# Altium PCB ir_sender.PcbDoc
Units mil, origin at the board's own origin, x right, y up, seen from the top; angles counter-clockwise.
Board outline 6000 x 4000 mil, 2 copper layers (Top Layer, Bottom Layer); 3 components, 3 nets, 6 pads, 0 vias.
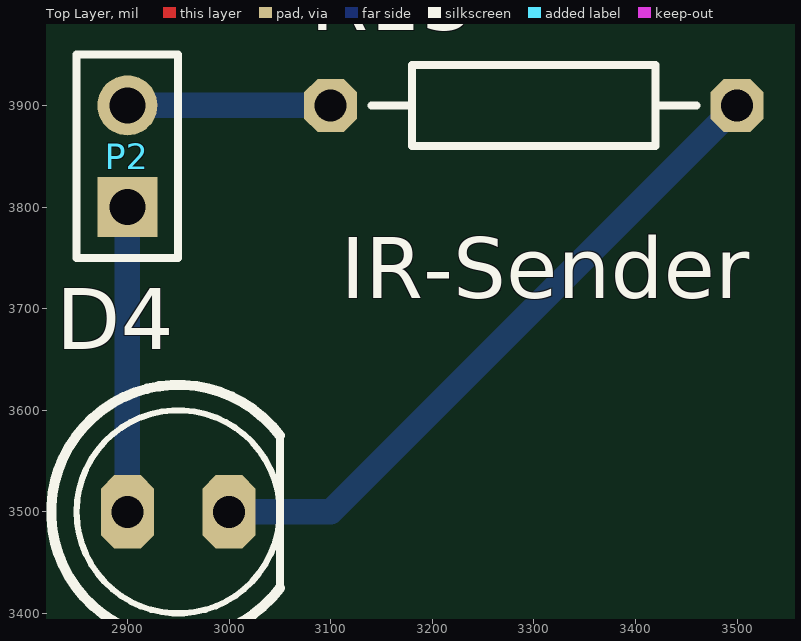
[diagram p0: Top Layer view]
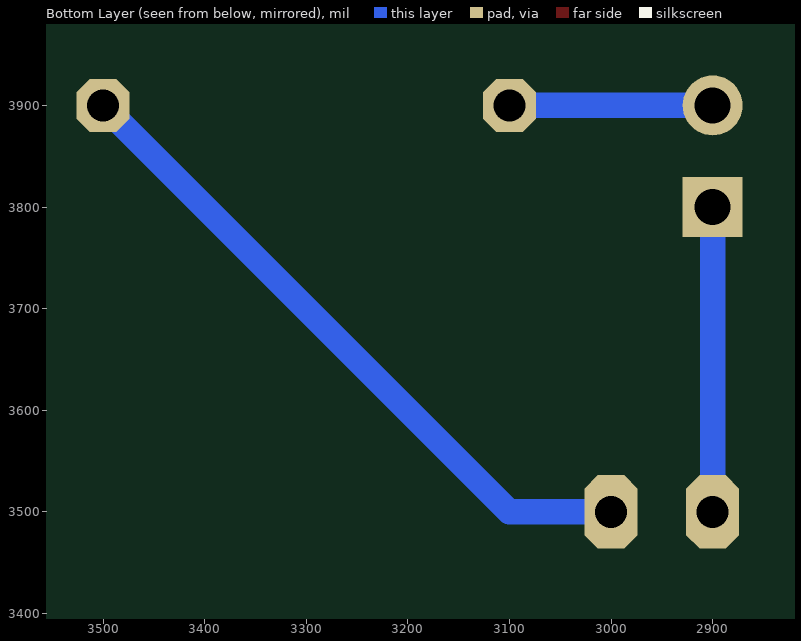
[diagram p1: Bottom Layer view, seen from below]

## Layer stack, top to bottom
Top Solder: solder mask 0.4, Solder Resist, Dk 3.5
Top Layer: signal copper 1.4
Dielectric1: dielectric 12.6, FR-4, Dk 4.8
Bottom Layer: signal copper 1.4
Bottom Solder: solder mask 0.4, Solder Resist, Dk 3.5

## Board outline
2580,2130 2580,6130 8580,6130 8580,2130

## Design rules (kind name [scope] priority, off if disabled: settings)
Clearance "Text (Polygon)" [inPolygon vs isText] p1: gap=0 ignorepadtopadclearanceinfootprint=FALSE
Clearance "Masseflaeche (Polygon)" [All vs inPolygon] p2: gap=20 ignorepadtopadclearanceinfootprint=FALSE except(0: Arc-Hole Track-Hole SMDPad-Hole THPad-Hole Via-Hole Fill-Hole Poly-Hole Region-Hole Text-Hole)
Clearance "Abstand (Clearance)" [All] p3: gap=10 ignorepadtopadclearanceinfootprint=FALSE except(0: Arc-Hole Track-Hole SMDPad-Hole THPad-Hole Via-Hole Fill-Hole Poly-Hole Region-Hole Text-Hole)
DiffPairsRouting [All] p1: maxlimit=15 minlimit=12 mostfreqgap=12 toplayer_minwidth=15 toplayer_maxwidth=15 toplayer_prefwidth=15 bottomlayer_minwidth=15 bottomlayer_maxwidth=15 bottomlayer_prefwidth=15 maxuncoupledlength=500
FabricationTestPointUsage TestPointUsage [All] p1: valid=0 allowmultiple=FALSE
FabricationTestpoint Testpoint [All] p1: side=3 testpointundercomponent=TRUE minsize=40 maxsize=100 preferedsize=60 minholesize=0 maxholesize=40 preferedholesize=32 testpointgrid=1 allowsidetop=TRUE allowsidebottom=TRUE usegrid=TRUE gridtolerance=0.01
HoleSize [All] p1: absolutevalues=TRUE maxlimit=100 minlimit=28 maxpercent=80.000 minpercent=20.000
HoleToHoleClearance [All] p1: gap=10 allowstackedmicrovias=FALSE
PlaneConnect [All] p1: planeconnectstyle=Relief reliefexpansion=20 reliefentries=4 reliefconductorwidth=32 reliefairgap=10
PolygonConnect [All] p1: connectstyle=Relief reliefconductorwidth=32 reliefentries=4 polygonreliefangle="90 Angle" airgapwidth=10
RoomDefinition ir_sender [InComponentClass('ir_sender')] p1: confinementstyle=ConfineIn formatcopy=TRUE lockcomponents=FALSE outline 2800,2300 8400,2300 8400,5900 2800,5900
RoutingVias [All] p1: holewidth=28 width=50 viastyle="Through Hole" minholewidth=28 minwidth=50 maxholewidth=28 maxwidth=50
SMDEntry [All] p1: side=TRUE corner=TRUE anyangle=FALSE
SilkToSilkClearance [All] p1 off: silktosilkclearance=10
SilkToSolderMaskClearance SilkscreenOverComponentPads [IsPad] p1 off: minsilkscreentomaskgap=10 clearancetoexposedcopper=TRUE
SolderMaskExpansion [All] p1: expansion=4 istentingtop=FALSE
UnRoutedNet [All] p1: checkbadconnections=TRUE
Width [All] p1: maxlimit=200 minlimit=11 preferedwidth=25 minimp=50.000000 maximp=50.000000 favimp=50.000000
21 further rules are at their usual default settings.

## Components (designator, comment, footprint, x,y, rotation, side; value= is the part's Value field where it differs from the comment)
D4 "LED IR" "LED_5MM - clear" 2900,3500 r0 top
P2 "Header 2" HDR1X2 2900,3800 r90 top
R13 "100" R_0207/RM4 3300,3900 r0 top

## Footprints (in the part's own frame and the unit in brackets; to place one, negate y for a bottom-side part, rotate by r counter-clockwise, add the part's x,y. Pads: shape width x height; smd on the part's side, far side on the other; paste and mask are expansions set on the pad)
HDR1X2 [mm] "Connector; Header; 2 Position"
  rect 1.5x1.5 hole 0.9: 1(0,0)
  round 1.5 hole 0.9: 2(2.54,0)
  silkscreen extent -1.27,-1.27 3.81,1.27
"LED_5MM - clear" [mil] "LED 5mm"
  oct 52x72 hole 31.5: A(0,0) K(100,0)
  silkscreen extent -75,-125 150,125, body extent -67,-118 146,118, height 485
R_0207/RM4 [mil] "type 0207, RM4"
  oct 52x52 hole 31.5: 1(-200,0) 2(200,0)
  silkscreen extent -160,-40 160,40, body extent -211,-44 211,44, height 94

## Part data
D4: library part LED_IR, "Infrared GaAs LED (Vf=1.2V, If=40mA)", LatestRevisionDate=01-Nov-2013, Published=21-Feb-2011, SimulationModellSource="Miscellaneous Devices", Usage="only permitted for non-commercial purposes at HTL I Innsbruck"
P2: "Header, 2-Pin", LatestRevisionDate=17-Jul-2002, LatestRevisionNote="Re-released for DXP Platform.", Publisher="Altium Limited"
R13: library part R, "Resistor", LatestRevisionDate=07-Sep-2019, Published=21-Feb-2011, Usage="only permitted for non-commercial purposes at HTL I Innsbruck"

## Nets (pads, with @x,y where several pads share a name; then routed paths per layer and width w, separated by ;. In a path a pad name is that pad's centre, name@x,y a point inside that pad or via, vN(x,y) a via of type N, cw(c..) or ccw(c..) an arc to the next point about the centre after c; other vN are vias at no path point)
+5: D4.A P2.1 | length 300
  Bottom Layer w25: D4.A P2.1
GND: P2.2 R13.1 | length 200
  Bottom Layer w25: P2.2 R13.1
NetD4_K: D4.K R13.2 | length 665.7
  Bottom Layer w25: D4.K 3100,3500 R13.2

## Other copper
Top Layer:
  text "LAYOUT TOP" at 10300,880 h70
  text "2" at 10300,280 h70
Bottom Layer:
  text "LAYOUT BOTTOM" at 10300,880 h70
  text "3" at 10300,280 h70

## Silkscreen, mask and mechanical layers (free items; w line width, h text height)
Top Overlay:
  text "IR-Sender" at 3110,3710 h60
  text "BESTUECK. TOP" at 10300,880 h70
  text "4" at 10300,280 h70
Bottom Overlay:
  text "BESTUECK. BOTTOM" at 10300,880 h70
  text "5" at 10300,280 h70
Mechanical 16 (Blatt-Beschriftung):
  drawing of 350 lines, arcs and shapes, not listed
  text "1" at 1427,7465 h70
  text "2" at 4287,7465 h70
  text "3" at 7167,7465 h70
  text "4" at 10037,7465 h70
  text "A" at 75,6559 h70
  text "A" at 11375,6559 h70
  text "B" at 75,4667 h70
  text "B" at 11375,4667 h70
  text "C" at 75,2757 h70
  text "C" at 11375,2757 h70
  text "TITEL:" at 6850,1300 h45
  text "IR-SENDER" at 6900,1180 h70
  text "NAME:" at 6850,1000 h45
  text "GRUPPE:" at 8350,1000 h45
  text "KLASSE:" at 9180,1000 h45
  text "DOKUMENTENART:" at 10250,1000 h45
  text "Hannah Purner, Philipp Dona" at 6900,880 h70
  text "5" at 8400,880 h70
  text "3AHEL" at 9230,880 h70
  text "D" at 75,867 h70
  text "D" at 11375,867 h70
  text "DATUM:" at 6850,700 h45
  text "REVISION:" at 8350,700 h45
  text "MASZSTAB:" at 9180,700 h45
  text "DOKUMENTENSTATUS:" at 10250,700 h45
  text "HTBLVA" at 5550,600 h70
  text ".PRINT_DATE" at 6900,580 h70
  text "0.1" at 8400,580 h70
  text ".Print_Scale" at 9230,580 h70
  text "ENTWURF" at 10300,580 h70
  text "Abt. Elektronik" at 5550,500 h70
  text "Anichstrasse 26-28" at 5550,400 h70
  text "SACHNUMMER/DATEINAME:" at 6850,400 h45
  text "BLATT:" at 10250,400 h45
  text "BLAETTER:" at 10800,400 h45
  text "A-6020 Innsbruck" at 5550,300 h70
  text ".PCB_FILE_NAME_NO_PATH" at 6900,280 h70
  text "6" at 10850,280 h70
  text "1" at 1427,65 h70
  text "2" at 4287,65 h70
  text "3" at 7167,65 h70
  text "4" at 10037,65 h70
Drill Drawing:
  text ".LEGEND" at 4700,1800 h60
  text "BOHRPLAN" at 10300,880 h70
  text "6" at 10300,280 h70